# Altium PCB test.PcbDoc
Units mil, origin at the board's own origin, x right, y up, seen from the top; angles counter-clockwise.
Board outline 6000 x 4000 mil, 4 copper layers (Top Layer, GND, 3V3, Bottom Layer), stack 30.634 mil thick; 44 components, 32 nets, 197 pads, 2 vias.
Unrouted connection lines stored in the file: 138.
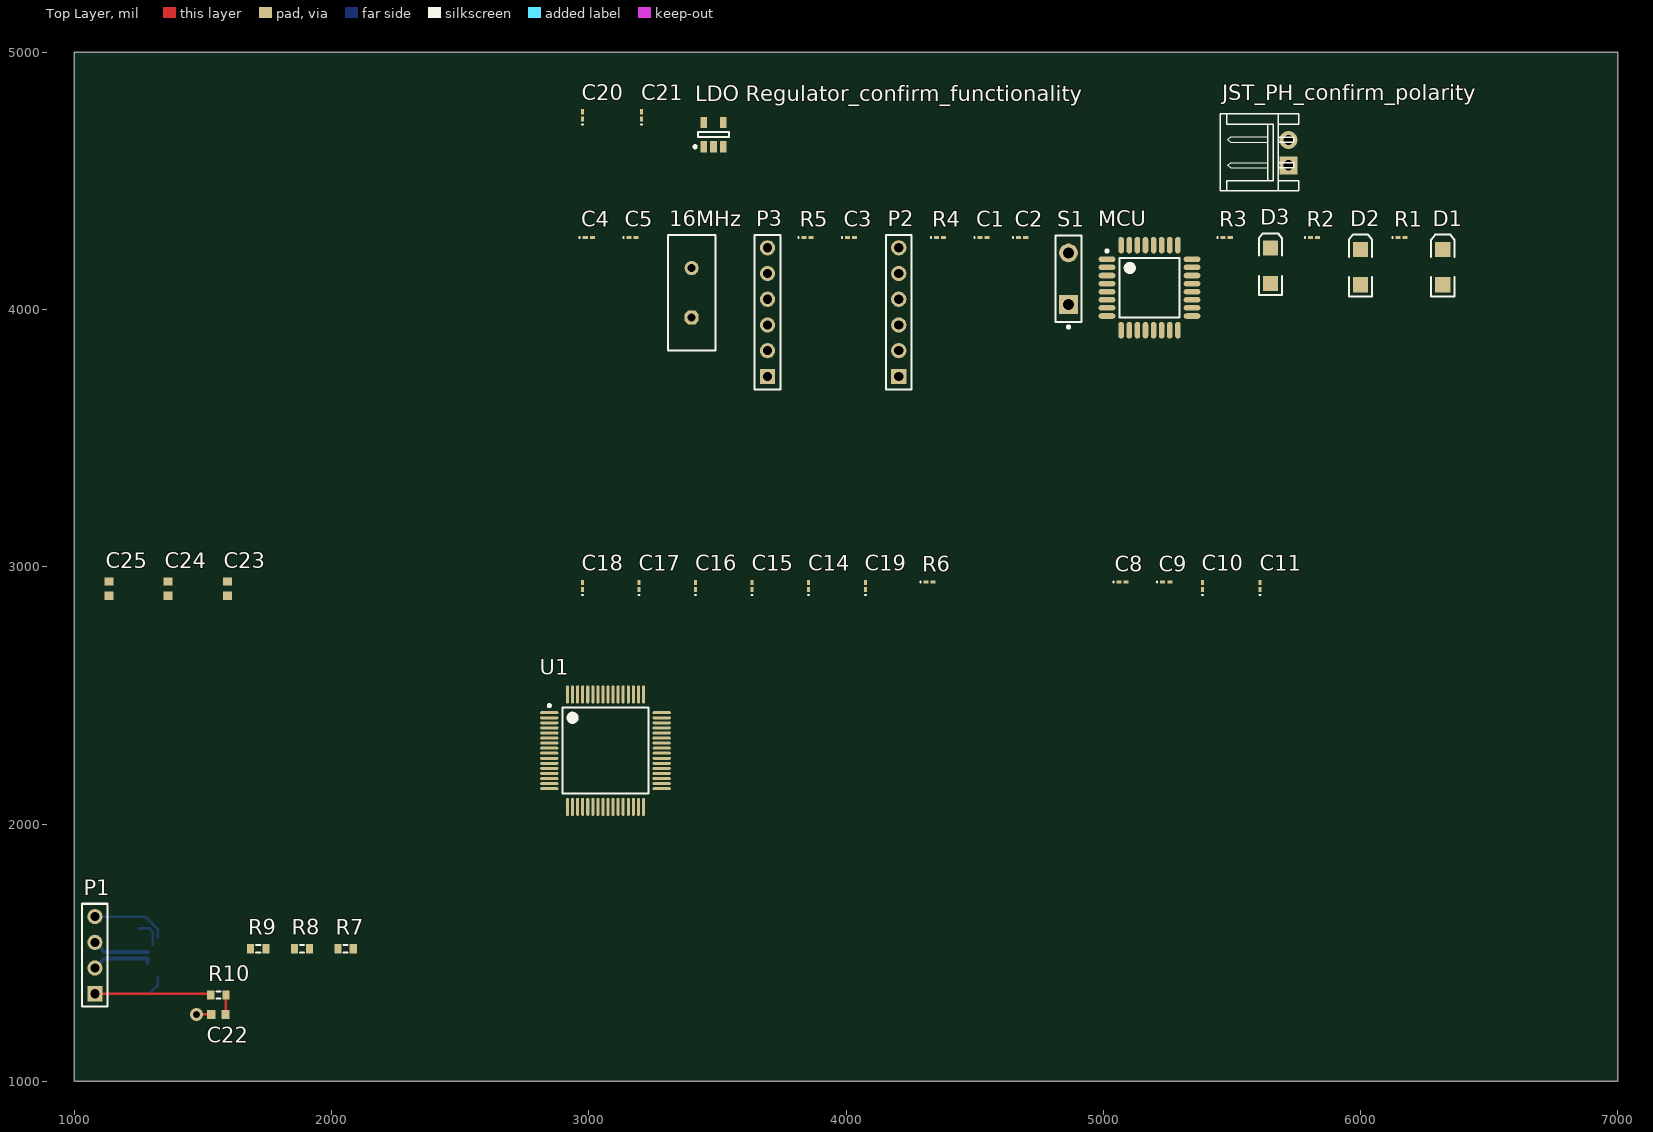
[diagram p0: Top Layer view]
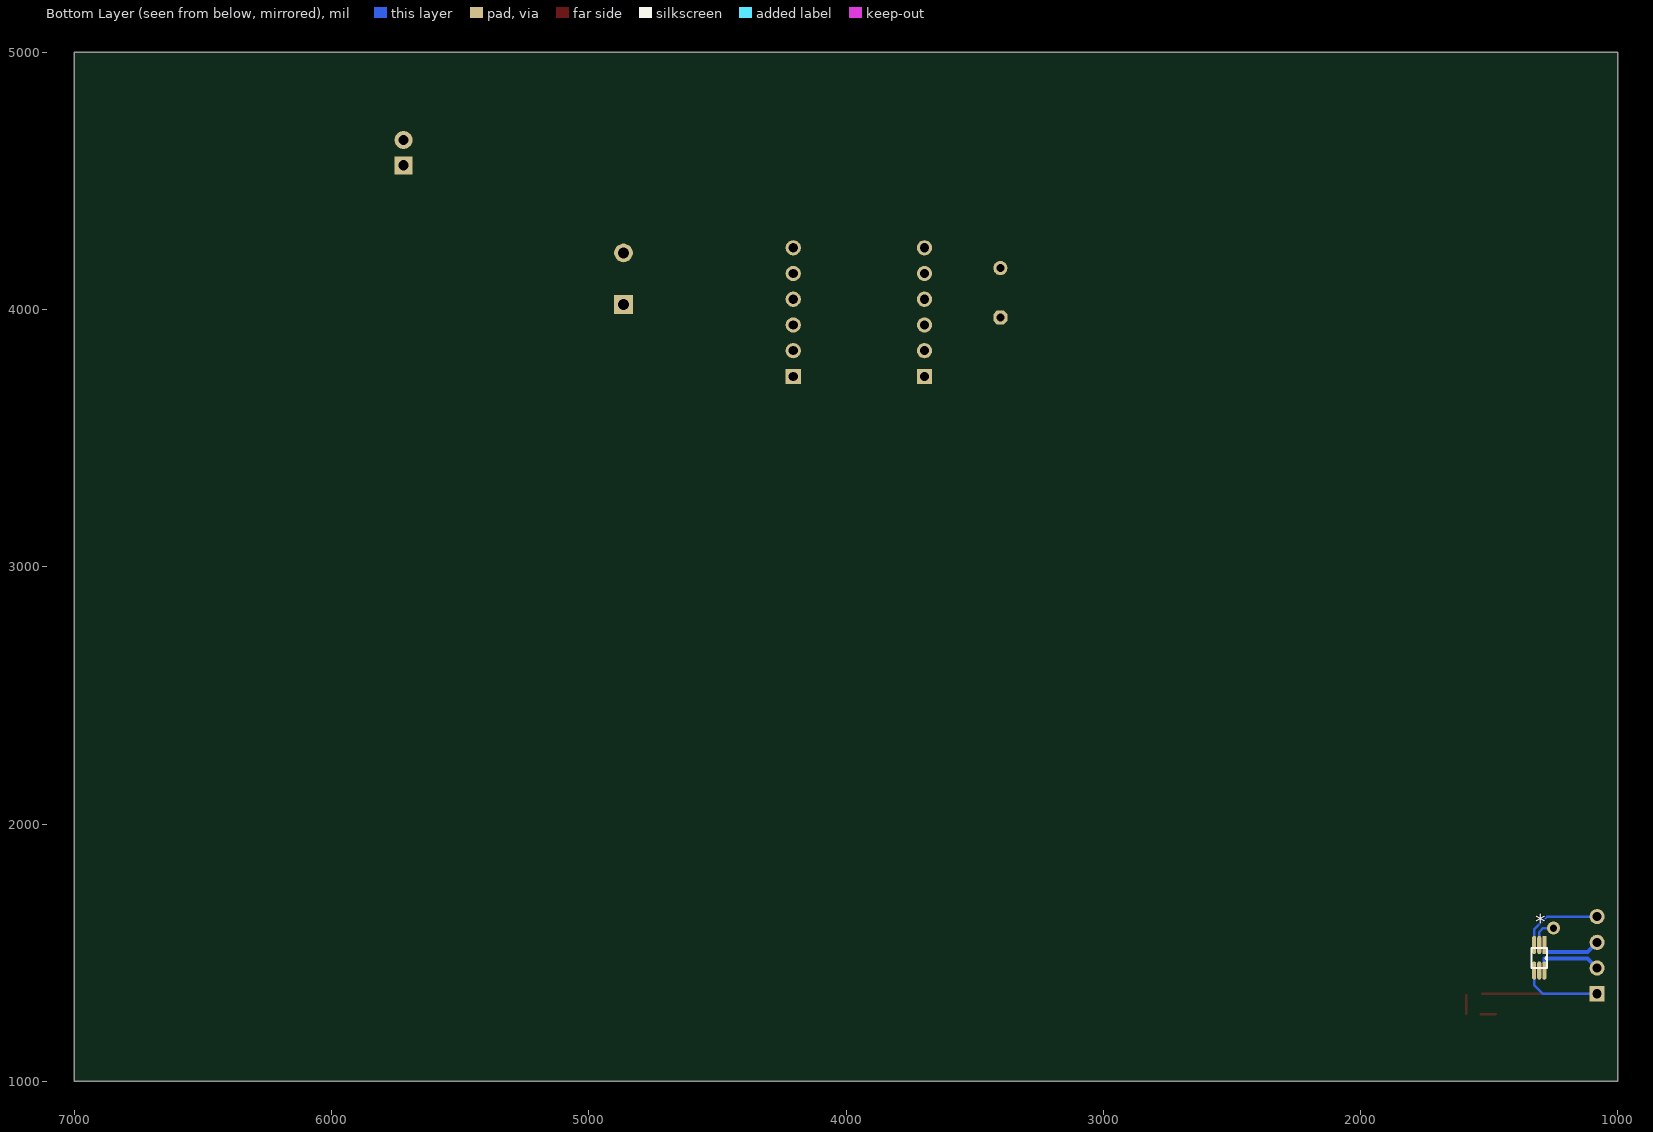
[diagram p1: Bottom Layer view, seen from below]
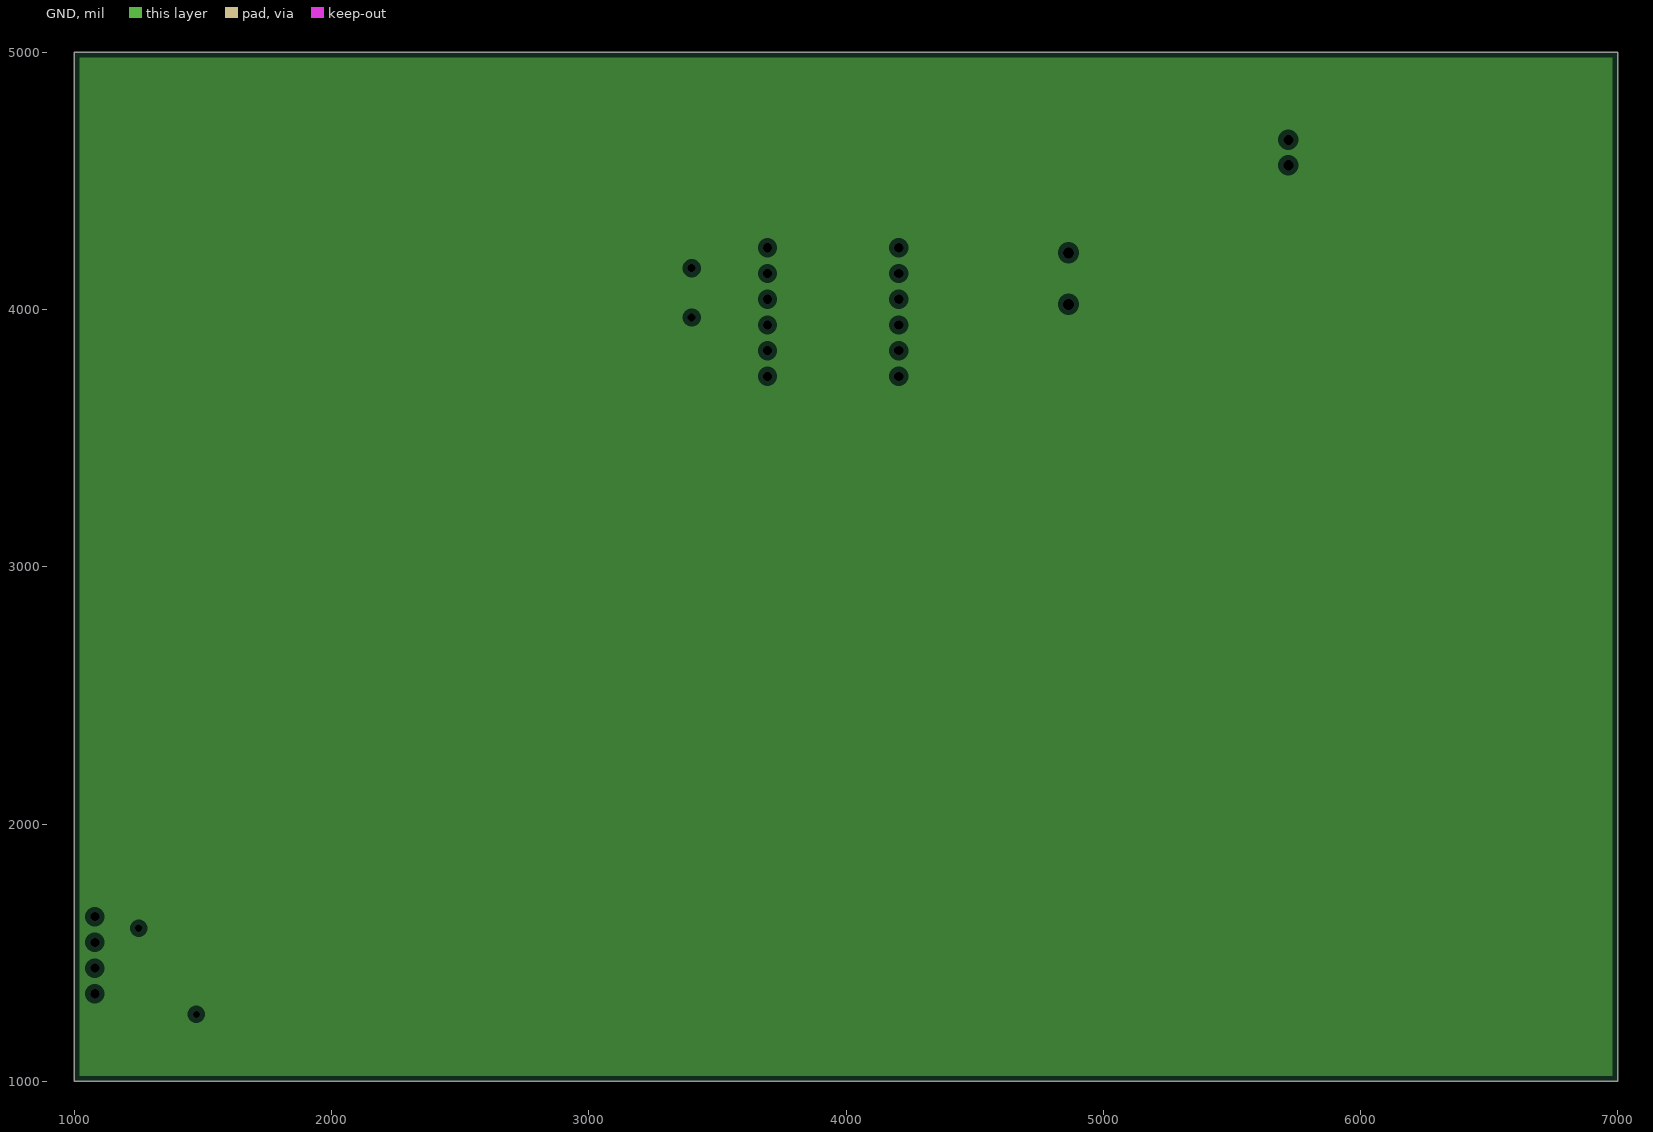
[diagram p2: GND, clearances drawn from the general rule]
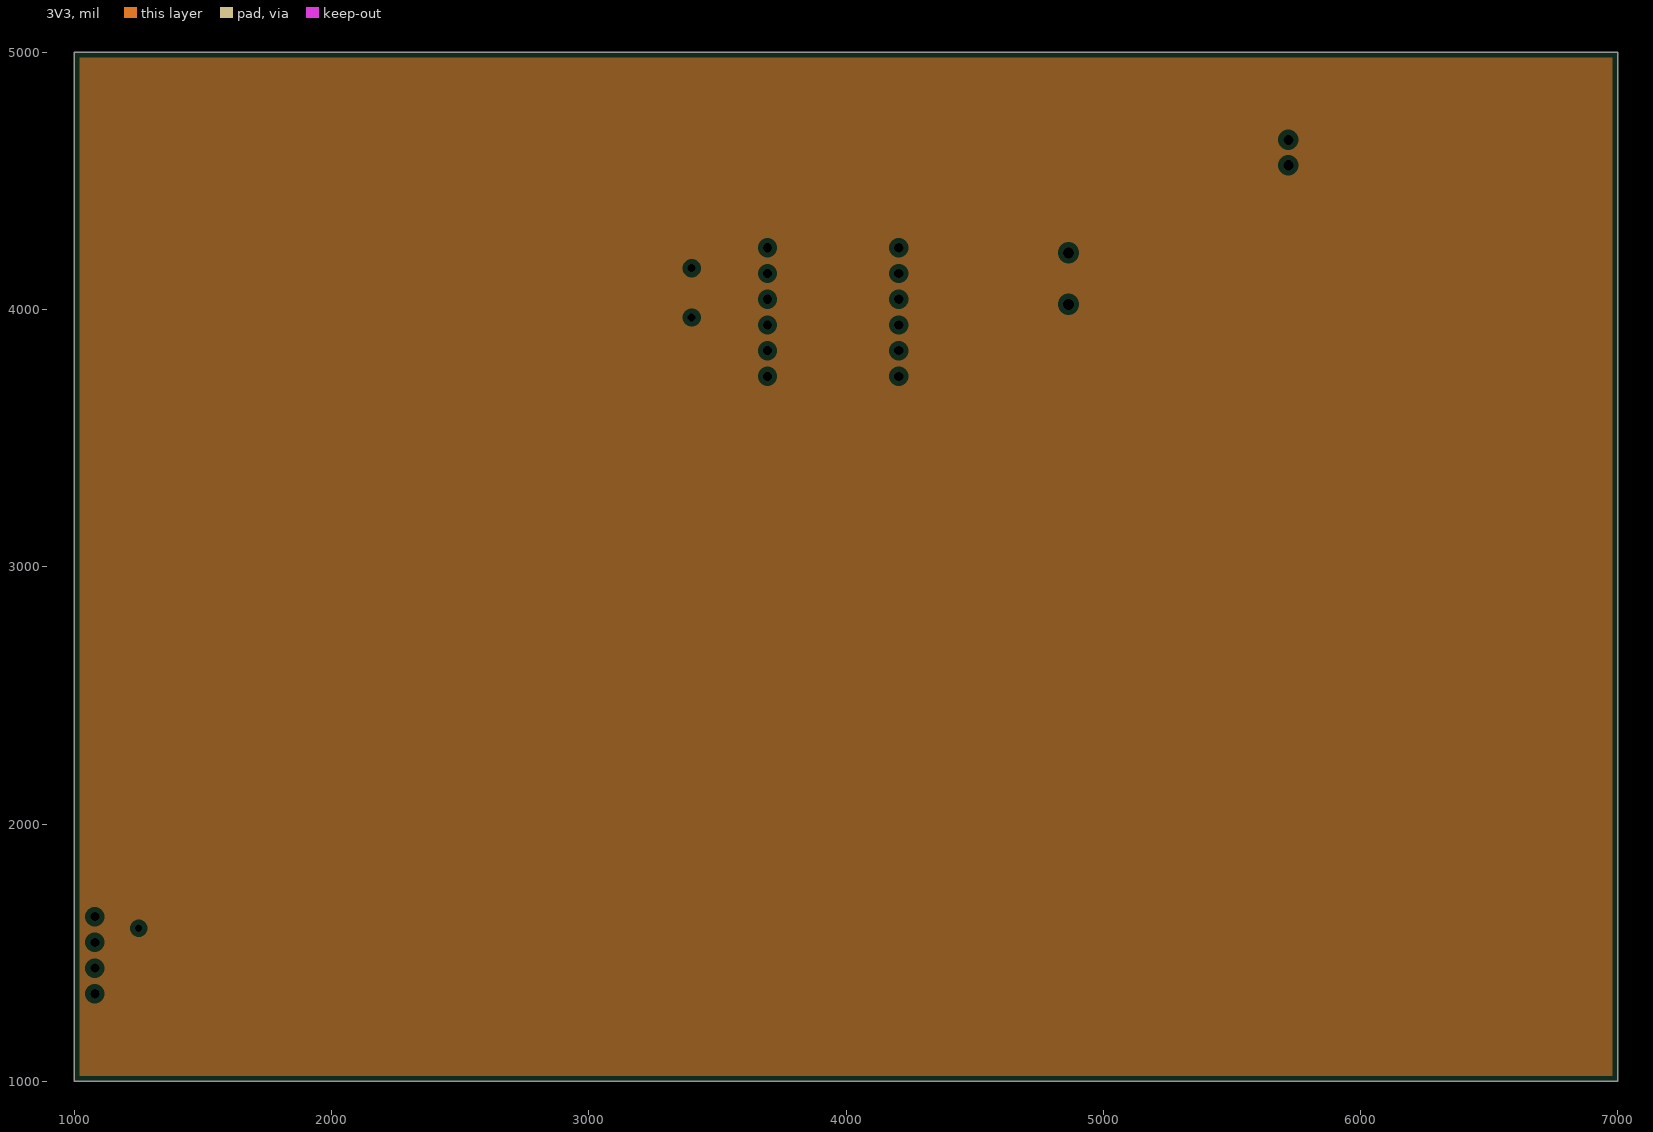
[diagram p3: 3V3, clearances drawn from the general rule]

## Layer stack, top to bottom
Top Solder: solder mask 0.4, Solder Resist, Dk 3.5
Top Layer: signal copper 1.4
Dielectric 1: core 10, FR-4, Dk 4.2
GND: plane copper 1.417
Dielectric 3: prepreg 5, FR-4, Dk 4.2
3V3: plane copper 1.417
Dielectric 2: core 10, FR-4, Dk 4.2
Bottom Layer: signal copper 1.4
Bottom Solder: solder mask 0.4, Solder Resist, Dk 3.5

## Board outline
1000,1000 7000,1000 7000,5000 1000,5000

## Design rules (kind name [scope] priority, off if disabled: settings)
Clearance [All] p1: gap=10
DiffPairsRouting [All] p1: maxlimit=10 minlimit=10 mostfreqgap=10 toplayer_minwidth=15 toplayer_maxwidth=15 toplayer_prefwidth=15 bottomlayer_minwidth=15 bottomlayer_maxwidth=15 bottomlayer_prefwidth=15 maxuncoupledlength=500
PlaneClearance [All] p1: clearance=20
PlaneConnect [All] p1: planeconnectstyle=Relief reliefexpansion=20 reliefentries=4 reliefconductorwidth=10 reliefairgap=10
PolygonConnect [All] p1: connectstyle=Relief reliefconductorwidth=10 reliefentries=4 polygonreliefangle="90 Angle" airgapwidth=10
RoomDefinition U_LP590_LDO_Regulator [InComponentClass('U_LP590_LDO_Regulator')] p1: confinementstyle=ConfineIn formatcopy=TRUE lockcomponents=FALSE outline 0,0 2000,0 2000,1000 0,1000
RoomDefinition U_Atmega328p [InComponentClass('U_Atmega328p')] p2: confinementstyle=ConfineIn formatcopy=TRUE lockcomponents=FALSE outline 0,0 2000,0 2000,1000 0,1000
RoomDefinition U_Analogue_frontend [InComponentClass('U_Analogue_frontend')] p3: confinementstyle=ConfineIn formatcopy=TRUE lockcomponents=FALSE outline 0,0 2000,0 2000,1000 0,1000
RoomDefinition U_ADS1299 [InComponentClass('U_ADS1299')] p4: confinementstyle=ConfineIn formatcopy=TRUE lockcomponents=FALSE outline 0,0 2000,0 2000,1000 0,1000
RoutingVias [All] p1: holewidth=28 width=50 viastyle="Through Hole" minholewidth=28 minwidth=50 maxholewidth=28 maxwidth=50
SolderMaskExpansion [All] p1: expansion=4
UnpouredPolygon [All] p1: allowunpoured=FALSE
Width [All] p1: maxlimit=10 minlimit=10 preferedwidth=10
26 further rules are at their usual default settings.

## Classes and differential pairs
component class U_LP590_LDO_Regulator: C20 C21 JST_PH_confirm_polarity "LDO Regulator_confirm_functionality"
component class U_Atmega328p: 16MHz C1 C2 C3 C4 C5 D1 D2 D3 MCU P2 P3 R1 R2 R3 R4 R5 S1
component class U_Analogue_frontend: * C22 C23 C24 C25 P1 R7 R8 R9 R10
component class U_ADS1299: C8 C9 C10 C11 C14 C15 C16 C17 C18 C19 R6 U1
differential pair IN1: +IN1_N -IN1_N

## Components (designator, comment, footprint, x,y, rotation, side; value= is the part's Value field where it differs from the comment)
16MHz "ECS-10-13-1_confirm_polarity" HC-49U 3400,4065 r90 top
* "TPD4E1B06DRLR" R-PDSO-N6 1285,1505 r270 bottom
C1 "Cap" 0603 4535,4280 r0 top
C2 "Cap" 0603 4685,4280 r0 top
C3 "Cap" 0603 4020,4280 r0 top
C4 "Cap" 0603 3000,4280 r0 top
C5 "Cap" 0603 3170,4280 r0 top
C8 "Cap" 0603 5075,2940 r0 top
C9 "Cap" 0603 5245,2940 r0 top
C10 "Cap" 0603 5385,2925 r90 top
C11 "Cap" 0603 5610,2925 r90 top
C14 "Cap" 0603 3855,2925 r90 top
C15 "Cap" 0603 3635,2925 r90 top
C16 "Cap" 0603 3415,2925 r90 top
C17 "Cap" 0603 3195,2925 r90 top
C18 "Cap" 0603 2975,2925 r90 top
C19 "Cap" 0603 4075,2925 r90 top
C20 "GRM188R71A225KE15D" 0603 2975,4755 r90 top
C21 "GRM188R71A225KE15D" 0603 3205,4755 r90 top
C22 "Cap Semi" 1608[0603] 1560,1260 r0 top
C23 "Cap Semi" 1608[0603] 1595,2915 r90 top
C24 "Cap Semi" 1608[0603] 1365,2915 r90 top
C25 "Cap Semi" 1608[0603] 1135,2915 r90 top
D1 "LED2" 3.2X1.6X1.1 6320,4165 r90 top
D2 "LED2" 3.2X1.6X1.1 6000,4165 r90 top
D3 "LED2" 3.2X1.6X1.1 5650,4170 r90 top
JST_PH_confirm_polarity "ValueValueAux" S2B-EH 5720,4610 r90 top
"LDO Regulator_confirm_functionality" "LP5907MFX-3.3/NOPB" DBV005_N 3485,4680 r90 top
MCU "ATmega328-AUR" 32A_N 5180,4085 r0 top
P1 "Electrode connections" HDR1X4 1080,1340 r90 top
P2 "FTDI" HDR1X6 4205,3740 r90 top
P3 "BlueSMiRF" HDR1X6 3695,3740 r90 top
R1 "Res" 0603 6160,4280 r0 top
R2 "Res" 0603 5820,4280 r0 top
R3 "Res" 0603 5480,4280 r0 top
R4 "Res" 0603 4365,4280 r0 top
R5 "Res" 0603 3850,4280 r0 top
R6 "Res" 0603 4325,2940 r0 top
R7 "Res3" J1-0603 2055,1515 r0 top
R8 "Res3" J1-0603 1885,1515 r0 top
R9 "Res3" J1-0603 1715,1515 r0 top
R10 "Res3" J1-0603 1560,1335 r0 top
S1 "SW-SPST" SPST-2 4865,4120 r90 top
U1 "Integrated ECG/EEG" TQFP-PT64_N 3065,2285 r0 top

## Footprints (in the part's own frame and the unit in brackets; to place one, negate y for a bottom-side part, rotate by r counter-clockwise, add the part's x,y. Pads: shape width x height; smd on the part's side, far side on the other; paste and mask are expansions set on the pad)
3.2X1.6X1.1 [mm] "SMT LED; 2 Flat Leads"
  rect 1.5x1.5 smd: 1(-1.75,0) 2(1.75,0)
  silkscreen extent -2.9,-1.15 3.2,1.15
32A_N [mm] "Thin QFP, 32-Leads, Body 7x7mm, Pitch 0.8mm, IPC Medium Density"
  oval 1.65x0.55 smd: 1(-4.2,2.8) 2(-4.2,2) 3(-4.2,1.2) 4(-4.2,0.4) 5(-4.2,-0.4) 6(-4.2,-1.2) 7(-4.2,-2) 8(-4.2,-2.8) 17(4.2,-2.8) 18(4.2,-2) 19(4.2,-1.2) 20(4.2,-0.4) 21(4.2,0.4) 22(4.2,1.2) 23(4.2,2) 24(4.2,2.8)
  oval 0.55x1.65 smd: 9(-2.8,-4.2) 10(-2,-4.2) 11(-1.2,-4.2) 12(-0.4,-4.2) 13(0.4,-4.2) 14(1.2,-4.2) 15(2,-4.2) 16(2.8,-4.2) 25(2.8,4.2) 26(2,4.2) 27(1.2,4.2) 28(0.4,4.2) 29(-0.4,4.2) 30(-1.2,4.2) 31(-2,4.2) 32(-2.8,4.2)
  silkscreen extent -4.32,-2.95 2.95,3.75, body extent -3.5,-3.5 3.5,3.5, height 1.2
0603 [mm] "Chip Inductor, Body 0.6x0.3mm, IPC High Density"
  rect 0.5x0.3 smd: 1(-0.35,0) 2(0.35,0)
  silkscreen extent -0.9,-0.05 -0.9,0.05, body extent -0.33,-0.18 0.33,0.18, height 0.55
1608[0603] [mm] "Chip Capacitor, Body 1.6x0.8mm, IPC High Density"
  rect 0.8x0.9 smd: 1(-0.7,0) 2(0.7,0)
  body extent -0.87,-0.48 0.87,0.48, height 1.3
DBV005_N [mm] "SOT23, 5-Leads, Body 2.9x1.6mm, Pitch 0.95mm, Lead Span 2.8mm, IPC Medium Density"
  rect 1.1x0.65 smd: 1(-1.2,0.95) 2(-1.2,0) 3(-1.2,-0.95) 4(1.2,-0.95) 5(1.2,0.95)
  silkscreen extent -1.32,-1.55 0.25,1.95, body extent -0.9,-1.55 0.9,1.55, height 1.45
HC-49U [mm] "Quartz Crystal, Thru-Hole; 2 Leads; Body 11.35 x 4.65 x 13.46 mm (LxWxH max)"
  oct 1.4x1.4 hole 0.8: 1(-2.44,0)
  round 1.4 hole 0.8: 2(2.44,0)
  silkscreen extent -5.7,-2.35 5.7,2.35
HDR1X4 [mm] "Connector; Header; 4 Position"
  rect 1.5x1.5 hole 0.9: 1(0,0)
  round 1.5 hole 0.9: 2(2.54,0) 3(5.08,0) 4(7.62,0)
  silkscreen extent -1.27,-1.27 8.89,1.27
HDR1X6 [mm] "Connector; Header; 6 Position"
  rect 1.5x1.5 hole 0.9: 1(0,0)
  round 1.5 hole 0.9: 2(2.54,0) 3(5.08,0) 4(7.62,0) 5(10.16,0) 6(12.7,0)
  silkscreen extent -1.27,-1.27 13.97,1.27
J1-0603 [mm] "Chip Resistor, Body 1.6x0.8mm, IPC High Density"
  rect 0.7x0.9 smd: 1(-0.75,0) 2(0.75,0)
  silkscreen extent -0.2,-0.35 0.2,0.35, body extent -0.85,-0.48 0.85,0.48, height 0.9
R-PDSO-N6 [mm]
  rect 1.802x0.4 smd: 1(-0.635,0)
  oval 1.802x0.4 smd: 2(-0.635,-0.508) 3(-0.635,-1.016) 4(1.905,-1.016) 5(1.905,-0.508) 6(1.905,0)
  silkscreen extent -0.31,-1.25 1.66,0.25
S2B-EH [mil] "EH Connector 2.5mm pitch, side entry"
  rect 70x70 hole 40: 1(-49.21,0)
  round 70 hole 40: 2(49.21,0)
  silkscreen extent -149,-40 151,265, body extent -149,-40 151,265, height 165
SPST-2 [mm] "Switch; 2 Leads"
  rect 1.85x1.85 hole 1.1: 1(-2.54,0)
  round 1.85 hole 1.1: 2(2.54,0)
  silkscreen extent -4.89,-1.27 4.28,1.27
TQFP-PT64_N [mm] "Thin QFP, 64-Leads, Body 10x10mm, Pitch 0.5mm, IPC Medium Density"
  oval 1.8x0.3 smd: 1(-5.55,3.75) 2(-5.55,3.25) 3(-5.55,2.75) 4(-5.55,2.25) 5(-5.55,1.75) 6(-5.55,1.25) 7(-5.55,0.75) 8(-5.55,0.25) 9(-5.55,-0.25) 10(-5.55,-0.75) 11(-5.55,-1.25) 12(-5.55,-1.75) 13(-5.55,-2.25) 14(-5.55,-2.75) 15(-5.55,-3.25) 16(-5.55,-3.75) 33(5.55,-3.75) 34(5.55,-3.25) 35(5.55,-2.75) 36(5.55,-2.25) 37(5.55,-1.75) 38(5.55,-1.25) 39(5.55,-0.75) 40(5.55,-0.25) 41(5.55,0.25) 42(5.55,0.75) 43(5.55,1.25) 44(5.55,1.75) 45(5.55,2.25) 46(5.55,2.75) 47(5.55,3.25) 48(5.55,3.75)
  oval 0.3x1.8 smd: 17(-3.75,-5.55) 18(-3.25,-5.55) 19(-2.75,-5.55) 20(-2.25,-5.55) 21(-1.75,-5.55) 22(-1.25,-5.55) 23(-0.75,-5.55) 24(-0.25,-5.55) 25(0.25,-5.55) 26(0.75,-5.55) 27(1.25,-5.55) 28(1.75,-5.55) 29(2.25,-5.55) 30(2.75,-5.55) 31(3.25,-5.55) 32(3.75,-5.55) 49(3.75,5.55) 50(3.25,5.55) 51(2.75,5.55) 52(2.25,5.55) 53(1.75,5.55) 54(1.25,5.55) 55(0.75,5.55) 56(0.25,5.55) 57(-0.25,5.55) 58(-0.75,5.55) 59(-1.25,5.55) 60(-1.75,5.55) 61(-2.25,5.55) 62(-2.75,5.55) 63(-3.25,5.55) 64(-3.75,5.55)
  silkscreen extent -5.67,-4.25 4.25,4.57, body extent -5,-5 5,5, height 1.2

## Part data
16MHz: library part ECS-10-13-1, "Crystal Oscillator"
*: "TVS DIODE 5.5VWM 14.5VC 6SOT"
C1 C2 C3 C4 C5 C8 C9 C10 C11 C14 C15 C16 C17 C18 C19: "Capacitor"
C20: "CAP, CERM, 2.2uF, 10V, +/-10%, X7R, 0603"
C21: "CAP, CERM, 2.2 µF, 10 V, +/- 10%, X7R, 0603"
C22 C23 C24 C25: "Capacitor (Semiconductor SIM Model)"
D1 D2 D3: "Typical RED, GREEN, YELLOW, AMBER GaAs LED"
JST_PH_confirm_polarity: library part JST-2, "=Description"
"LDO Regulator_confirm_functionality": "ULTRA LOW-NOISE, 250-mA LINEAR REGULATOR FOR RF AND ANALOG CIRCUITS REQUIRES NO BYPASS CAPACITOR, DBV0005A"
MCU: "8-bit AVR Microcontroller, 32KB Flash, 1KB EEPROM, 2KB SRAM, 32-pin TQFP, Industrial Grade (-40°C to 85°C)"
P1: library part "Header 4", "Header, 4-Pin"
P2 P3: library part "Header 6", "Header, 6-Pin"
R1 R2 R3 R4 R5 R6: library part Res1, "Resistor"
R7 R8 R9 R10: "Resistor"
S1: "Single-Pole, Single-Throw Switch"
U1: library part ADS1298-TQFP

## Via types
v1: diameter 50, hole 28, Top Layer to GND, 1 vias
v2: diameter 50, hole 28, GND to Bottom Layer, 1 vias

## Nets (pads, with @x,y where several pads share a name; then routed paths per layer and width w, separated by ;. In a path a pad name is that pad's centre, name@x,y a point inside that pad or via, vN(x,y) a via of type N, cw(c..) or ccw(c..) an arc to the next point about the centre after c; other vN are vias at no path point)
3V3: "LDO Regulator_confirm_functionality.5" C1.2 C2.2 C8.2 C9.2 C21.2 MCU.4 MCU.18 P2.3 P3.2 R4.2 U1.1 U1.2 U1.3 U1.4 U1.5 U1.6 U1.7 U1.8 U1.9 U1.10 U1.11 U1.12 U1.13 U1.14 U1.19 U1.21 U1.22 U1.35 U1.48 U1.50 U1.52 U1.54 U1.56 U1.59
BIAS_DRV: C19.2 C25.2 R6.2 R7.2
C\S\: MCU.14 U1.39
D\R\D\Y: MCU.26 U1.47
"DAISY IN": "LDO Regulator_confirm_functionality.2" *.2 C1.1 C2.1 C3.1 C4.1 C5.1 C8.1 C9.1 C10.2 C11.2 C14.1 C15.1 C16.1 C17.1 C18.1 C20.1 C21.1 C22.1 C23.1 C24.1 C25.1 JST_PH_confirm_polarity.2 MCU.3 MCU.5 MCU.21 P2.1 P2.2 P3.1 P3.3 R1.1 R2.1 R3.1 S1.2 U1.20 U1.23 U1.25 U1.31 U1.32 U1.33 U1.41 U1.49 U1.51 U1.53 U1.57 U1.58 U1.60 U1.64 | length 168.7
  Top Layer w10: v1(1475,1260) C22.1
  Bottom Layer w10: v2(1250,1595) 1290,1595 1305,1580 *.2
IN1_N: *.4 C23.2 P1.2 R9.1 R9.2 U1.16
IN1_N: *.3 C24.2 P1.3 R8.1 R8.2 U1.15 | length 220.5
  Bottom Layer w15: P1.3 1117.5,1502.5 1285,1502.5
MISO: MCU.16 U1.43
MOSI: MCU.15 U1.34
Net16MHz_1: 16MHz.1 C4.2 MCU.8
Net16MHz_2: 16MHz.2 C5.2 MCU.7
Net*_1: *.1 P1.4 R7.1 | length 295.7
  Bottom Layer w10: P1.4 1275,1640 1325,1590 1325,1560
NetC3_2: C3.2 MCU.20
NetC10_1: C10.1 C11.1 U1.24
NetC14_2: C14.2 U1.26
NetC15_2: C15.2 C16.2 U1.55
NetC17_2: C17.2 U1.30
NetC18_2: C18.2 U1.28
NetC19_1: C19.1 R6.1 U1.62 U1.63
NetD1_1: D1.1 MCU.23
NetD1_2: D1.2 R1.2
NetD2_1: D2.1 MCU.24
NetD2_2: D2.2 R2.2
NetD3_1: D3.1 MCU.25
NetD3_2: D3.2 R3.2
NetP2_4: P2.4 P3.4 R5.1
R\E\S\E\T: MCU.29 P2.6 P3.6 R4.1 S1.1 U1.36
RAW: "LDO Regulator_confirm_functionality.1" "LDO Regulator_confirm_functionality.3" C20.2 JST_PH_confirm_polarity.1
RXD: MCU.31 P2.5 P3.5
SCLK: MCU.17 U1.40
SRB2: *.6 C22.2 P1.1 R10.1 R10.2 U1.18 | length 808
  Top Layer w10: P1.1 R10.1@1525.47,1340 ; C22.2@1589.53,1261.97 R10.2
  Bottom Layer w10: P1.1 1290,1340 1325,1375 1325,1405
TXD: MCU.30 R5.2
pads on no net: "LDO Regulator_confirm_functionality.4" *.5 MCU.1 MCU.2 MCU.6 MCU.9 MCU.10 MCU.11 MCU.12 MCU.13 MCU.19 MCU.22 MCU.27 MCU.28 MCU.32 U1.17 U1.27 U1.29 U1.37 U1.38 U1.42 U1.44 U1.45 U1.46 U1.61
copper on no net: | length 238
  Bottom Layer w15: 1080,1440 1117.5,1477.5 1285,1477.5 1285,1460

## Polygon pours and split planes (outlines as drawn)
no net on GND (split plane): 6979.9,1020.1 1020.1,1020.1 1020.1,4979.9 6979.9,4979.9
no net on 3V3 (split plane): 6979.9,1020.1 1020.1,1020.1 1020.1,4979.9 6979.9,4979.9